# EAGLE board Temp controlled fan (2) (EAGLE 8.4.1)
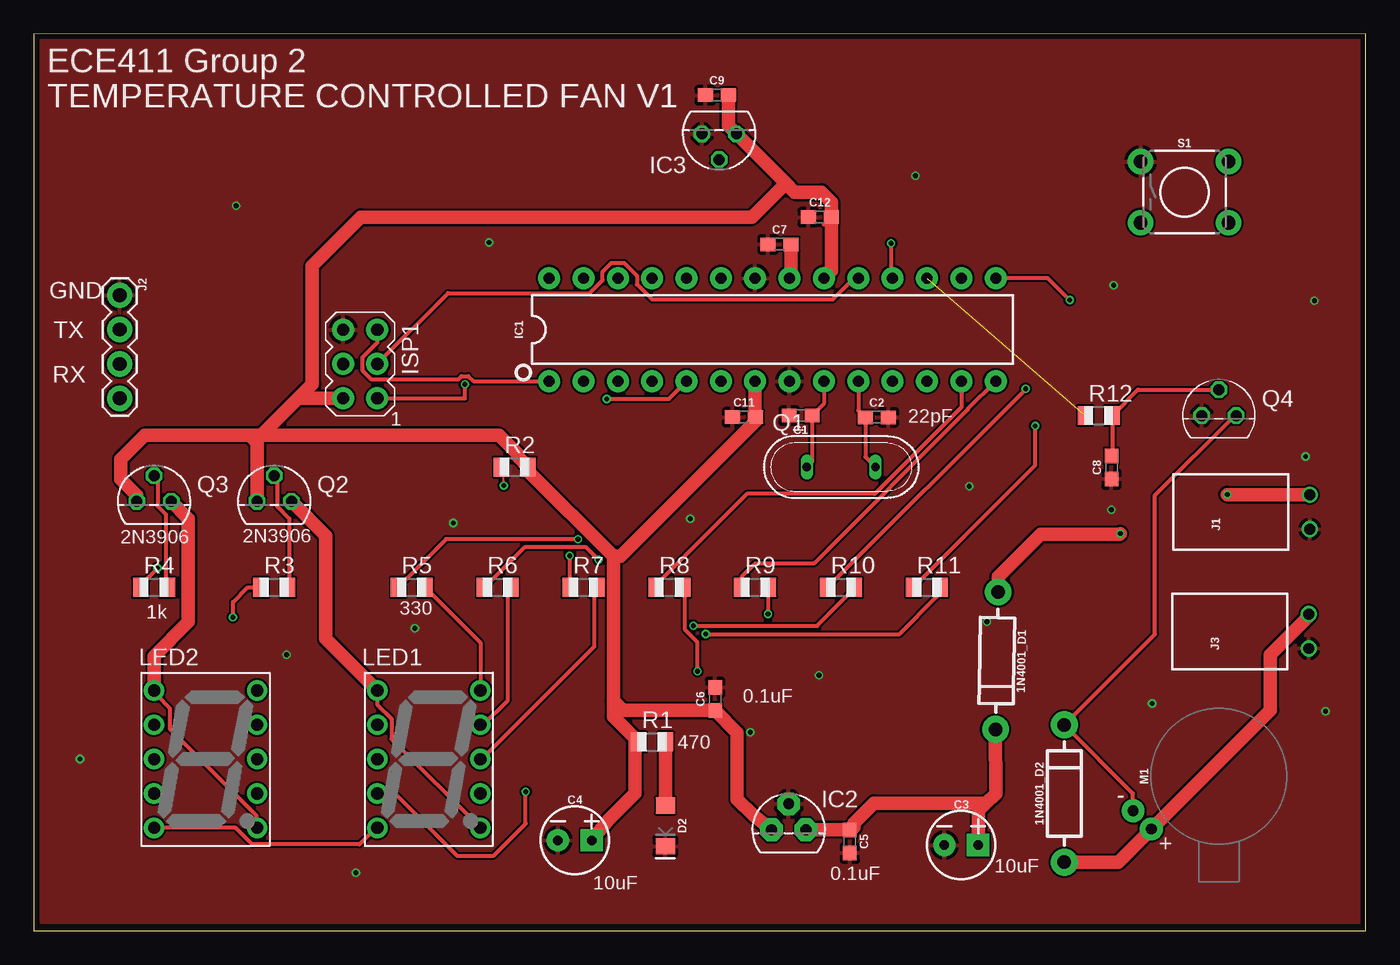
[diagram p0: board, top side]
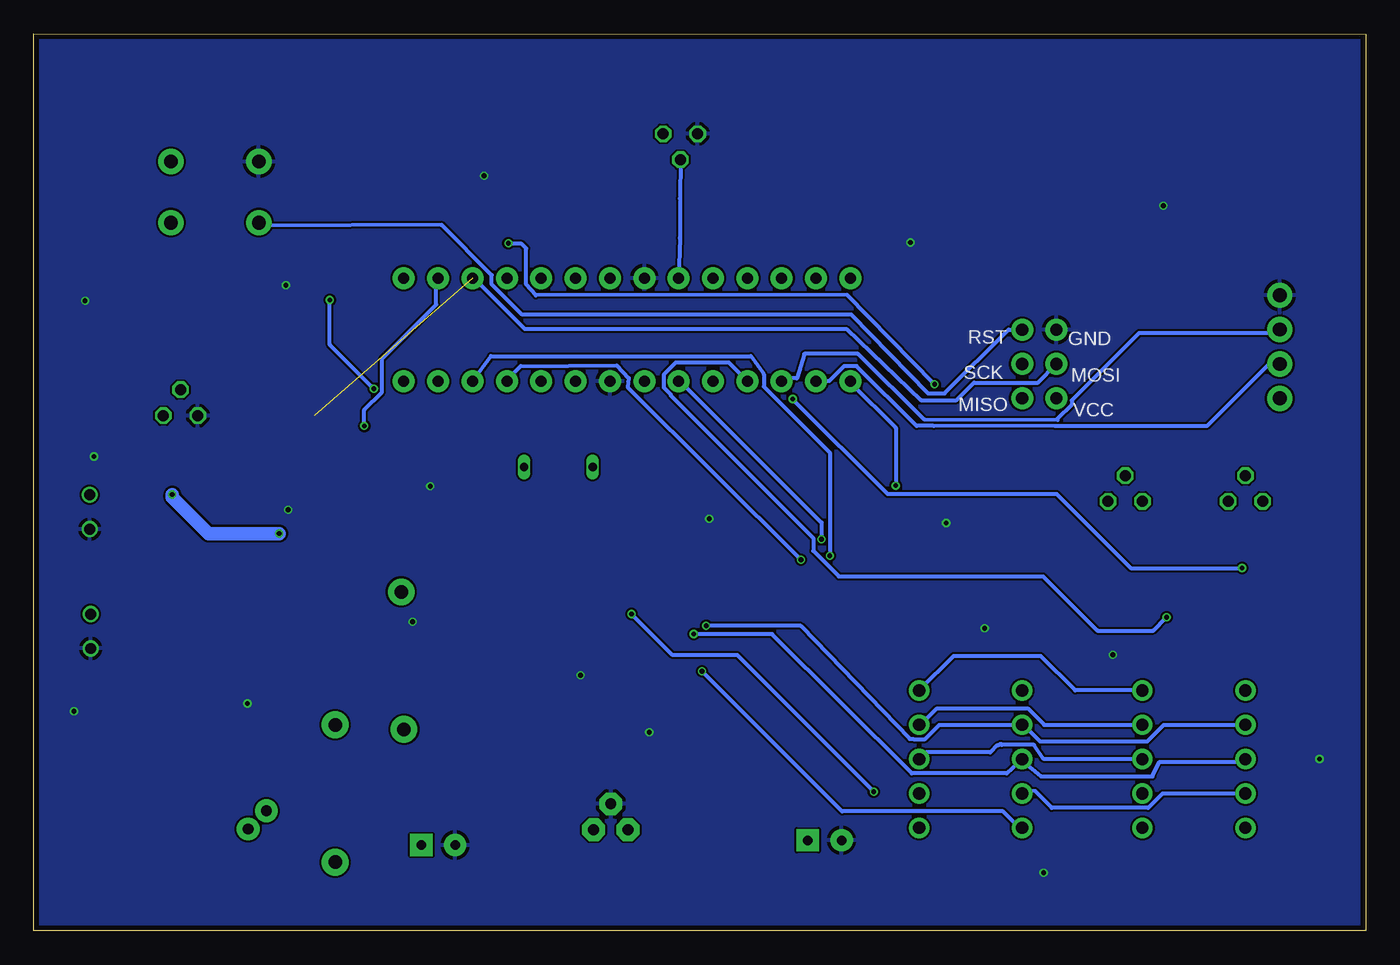
[diagram p1: board, bottom side, seen from below]

Size 98.48 x 66.31 mm. Coordinates in mm from the lower left corner, seen from the top.
Outline: 0,0 98.48,0.03 98.48,66.31 0,66.28 0,0
Copper layers (1*16): Top 0.035559375mm / dielectric 1.6mm / Bottom 0.035559375mm
Design rules "oshpark-2layer": minimum track width 6mil, minimum drill 10mil, track to track 6mil, track to pad 6mil, pad to pad 6mil, via to via 6mil, smd to smd 6mil, copper to edge 15mil, drill to drill 6mil, minimum pad ring 5mil, minimum via ring 5mil, stop-mask expansion 2.5mil, vias tented up to drill 0mil, thermal gap 10mil

## Footprints (pad centres in the part's own frame; a part is rotated, then mirrored left to right if it is on the bottom)
DIODE-1N4001 = drill 1 pad 1.981: A -5.08,0; C 5.08,0
0603 = smd 1.1 x 1: 1 -0.85,0; 2 0.85,0
CPOL-RADIAL-2.5MM-5MM = drill 0.7 pad 1.651 square: 1 1.25,0 | drill 0.7 pad 1.651: 2 -1.25,0
LED-1206 = smd 1.2 x 1.4: A -1.5,0; C 1.5,0
DIP28 = drill 0.813 pad 1.626: 1 -16.51,-3.81; 2 -13.97,-3.81; 3 -11.43,-3.81; 4 -8.89,-3.81; 5 -6.35,-3.81; 6 -3.81,-3.81; 7 -1.27,-3.81; 8 1.27,-3.81; 9 3.81,-3.81; 10 6.35,-3.81; 11 8.89,-3.81; 12 11.43,-3.81; 13 13.97,-3.81; 14 16.51,-3.81; 15 16.51,3.81; 16 13.97,3.81; 17 11.43,3.81; 18 8.89,3.81; 19 6.35,3.81; 20 3.81,3.81; 21 1.27,3.81; 22 -1.27,3.81; 23 -3.81,3.81; 24 -6.35,3.81; 25 -8.89,3.81; 26 -11.43,3.81; 27 -13.97,3.81; 28 -16.51,3.81
TO92 = drill 0.813 pad 1.676 octagon: 1 -1.27,0; 2 0,1.905; 3 1.27,0
TO92' = drill 0.813 octagon: 1 -1.27,0; 2 0,1.905; 3 1.27,0
AVRISP = drill 0.9 pad 1.626: 1 -1.27,2.54; 2 1.27,2.54; 3 -1.27,0; 4 1.27,0; 5 -1.27,-2.54; 6 1.27,-2.54
1X02_RA_PTH_FEMALE = drill 0.8: 1 1.27,-5.85; 2 -1.27,-5.85
1X04 = drill 1.016 pad 1.88: 1 0,0; 2 2.54,0; 3 5.08,0; 4 7.62,0
LA-401 = drill 0.9 pad 1.5: 1 -3.81,5.08; 2 -3.81,2.54; 3 -3.81,0; 4 -3.81,-2.54; 5 -3.81,-5.08; 6 3.81,-5.08; 7 3.81,-2.54; 8 3.81,0; 9 3.81,2.54; 10 3.81,5.08
VIBE-MOTOR-10MM = drill 0.8 pad 1.676: + -5,-3.9; - -6.35,-2.54
QS = drill 0.61 long: 1 -2.54,0; 2 2.54,0
TO92'' = drill 0.813 octagon: 1 1.27,0; 2 0,1.905; 3 -1.27,0
R0805 = smd 1.1 x 1.4: 1 -1,0; 2 1,0
TACTILE_SWITCH_PTH_6.0MM = drill 1.016 pad 1.88: 1 -3.251,2.261; 2 3.251,2.261; 3 -3.251,-2.261; 4 3.251,-2.261

## Placement (x,y rotation side)
1N4001_D1  1A/50V/1.1V  [DIODE-1N4001]  71.21,19.98 268.9 top
1N4001_D2  1A/50V/1.1V  [DIODE-1N4001]  76.2,10.16 90 top
C1  22pF  [0603]  56.7,38.09 180 top
C2  22pF  [0603]  62.33,37.97 0 top
C3  10uF  [CPOL-RADIAL-2.5MM-5MM]  68.58,6.35 0 top
C4  10uF  [CPOL-RADIAL-2.5MM-5MM]  40.01,6.7 0 top
C5  0.1uF  [0603]  60.34,6.62 270 top
C6  0.1uF  [0603]  50.38,17.15 90 top
C7  100nF  [0603]  55.14,50.76 0 top
C8  100nF  [0603]  79.69,34.26 90 top
C9  100nF  [0603]  50.5,61.79 0 top
C11  100nF  [0603]  52.52,37.98 0 top
C12  100nF  [0603]  58.12,52.77 0 top
D2  2.5V  [LED-1206]  46.7,7.77 270 top
IC1  ATMEGA328P  [DIP28]  54.61,44.45 0 top
IC2  7805L  [TO92]  55.82,7.48 0 top
IC3  LM35  [TO92']  50.67,58.92 180 top
ISP1  AVRISP-6  [AVRISP]  24.13,41.91 180 top
J1  9V/12V  [1X02_RA_PTH_FEMALE]  88.5,30.97 90 top
J2  [1X04]  6.35,46.99 270 top
J3  9V/12V  [1X02_RA_PTH_FEMALE]  88.43,22.15 90 top
LED1  LA-401MD  [LA-401]  29.21,12.7 0 top
LED2  LA-401MD  [LA-401]  12.7,12.7 0 top
M1  MOTOR10MM  [VIBE-MOTOR-10MM]  87.63,11.43 0 top
Q1  16MHz  [QS]  59.69,34.29 0 top
Q2  2N3906  [TO92'']  17.78,31.75 0 top
Q3  2N3906  [TO92'']  8.89,31.75 0 top
Q4  2N3904  [TO92'']  87.63,38.1 0 top
R1  470  [R0805]  45.72,13.97 0 top
R2  10K  [R0805]  35.56,34.29 0 top
R3  1K  [R0805]  17.78,25.4 0 top
R4  1K  [R0805]  8.89,25.4 0 top
R5  330  [R0805]  27.94,25.4 0 top
R6  330  [R0805]  34.29,25.4 0 top
R7  330  [R0805]  40.64,25.4 0 top
R8  330  [R0805]  46.99,25.4 0 top
R9  330  [R0805]  53.34,25.4 0 top
R10  330  [R0805]  59.69,25.4 0 top
R11  330  [R0805]  66.04,25.4 0 top
R12  1K  [R0805]  78.74,38.1 0 top
S1  MOMENTARY-SWITCH-SPST-PTH-6.0MM  [TACTILE_SWITCH_PTH_6.0MM]  85.09,54.61 0 top

## Library data of the parts
1N4001_D1 1N4001_D2 = SparkFun-DiscreteSemi; PROD_ID: DIO-09176
C1 C2 C7-C9 C11 C12 = SparkFun-Capacitors; PROD_ID: CAP-07876
C3 C4 = SparkFun-Capacitors; PROD_ID: CAP-08440
C5 C6 = SparkFun-Capacitors; PROD_ID: CAP-08604
D2 = SparkFun-LED
IC1 = SparkFun-IC-Microcontroller; PROD_ID: IC-09136
IC2 ISP1 R1-R12 = adafruit
IC3 = lm35
J1 J3 = SparkFun-Connectors; PROD_ID: CONN-13700
J2 = SparkFun-Connectors; PROD_ID: CONN-09696
LED1 LED2 = led-7-segment; OC_FARNELL: unknown; OC_NEWARK: unknown
M1 = SparkFun-Electromechanical; PROD_ID: COMP-08572; SF_SKU: ROB-08449
Q1 = special
Q2 Q3 = transistor-pnp
Q4 = transistor-npn
S1 = SparkFun-Switches; PROD_ID: SWCH-08441; SF_SKU: COM-00097

## Nets
CTRL1: IC1.4 R3.1
CTRL2: IC1.5 R4.1
GND: C1.2 C2.2 C3.2 C4.2 C5.2 C6.2 C7.1 C8.1 C9.1 C11.1 C12.1 D2.C IC1.8 IC1.22 IC2.2 IC3.3 ISP1.6 J1.2 J2.1 J3.2 Q4.3 S1.1
MISO: IC1.18 ISP1.1
MOSI: IC1.17 ISP1.4 R12.1
N$1: C2.1 IC1.10 Q1.2
N$2: C7.2 IC1.21
N$3: C1.1 IC1.9 Q1.1
N$4: IC1.23 IC3.2
N$5: D2.A R1.2
N$7: 1N4001_D1.C C3.1 C5.1 IC2.3
N$9: LED2.1 LED2.6 Q3.1
N$11: LED1.1 LED1.6 Q2.1
N$12: Q3.2 R4.2
N$13: Q2.2 R3.2
N$14: C8.2 Q4.2 R12.2
N$15: 1N4001_D2.C M1.- Q4.1
N$18: IC1.16 R11.1
N$19: IC1.15 R10.1
N$20: IC1.14 R9.1
N$21: IC1.13 R8.1
N$22: IC1.12 R7.1
N$23: IC1.11 R6.1
N$24: IC1.6 R5.1
RST: IC1.1 ISP1.5 R2.1 S1.3
RX: IC1.2 J2.3
SCK: IC1.19 ISP1.3
SEG_A: LED1.10 LED2.10 R5.2
SEG_B: LED1.9 LED2.9 R6.2
SEG_C: LED1.8 LED2.8 R7.2
SEG_D: LED1.5 LED2.5 R8.2
SEG_E: LED1.4 LED2.4 R9.2
SEG_F: LED1.2 LED2.2 R10.2
SEG_G: LED1.3 LED2.3 R11.2
TX: IC1.3 J2.2
V_IN: 1N4001_D1.A J1.1
V_MOTOR: 1N4001_D2.A J3.1 M1.+
VCC: C4.1 C6.1 C9.2 C11.2 C12.2 IC1.7 IC1.20 IC2.1 IC3.1 ISP1.2 Q2.3 Q3.3 R1.1 R2.2

## Tracks (layer width: path | path; a pad name or v marks a point on that pad's centre or on a via)
CTRL1  (via drill 0.35)
  Top 0.305: 16.78,25.24 R3.1 15.82,25.4 14.73,24.3 v14.73,23.19 v14.73,23.18
  Bottom 0.305: IC1.4 47.08,42 51.02,42 51.92,41.1 51.92,40.18 51.39,39.65 51.39,39.58 40.84,29.03 40.84,28.09 38.96,26.22 23.85,26.22 19.83,22.2 15.72,22.2 v14.73,23.18
CTRL2  (via drill 0.35)
  Top 0.152: 7.92,25.6 R4.1
  Top 0.305: v9.14,26.82 7.92,25.6 | v42.37,39.32 46.94,39.32 IC1.5
  Bottom 0.305: v9.14,26.82 17.37,26.82 22.86,32.31 35.36,32.31 v42.37,39.32
GND  (via drill 0.35)
  other vias: 14.97,53.6 33.67,50.88 65.19,55.81 79.84,47.72 79.67,31.14 69.17,32.87 48.54,30.46 31.02,30.15 28.17,22.38 18.7,20.42 3.41,12.71 23.82,4.3 52.97,14.68 58.05,18.9 70.48,22.85 82.69,16.81 95.51,16.25 94.04,35.07 94.69,46.59
  pour Top: 0.56,66.03 0.56,0.66 98.15,0.66 98.15,66.01 0.93,66.01
  pour Bottom: 0.35,66.06 0.35,0.48 98.2,0.48 98.2,66.08 0.84,66.08
MISO  (via drill 0.35)
  Top 0.305: ISP1.1 31.89,39.37 v31.88,40.4 | v63.39,50.83 63.39,48.37 IC1.18
  Bottom 0.305: v31.88,40.4 38.36,47.02 61.36,46.98 62.08,47.8 62.08,50.46 62.41,50.8 63.35,50.8 v63.39,50.83
MOSI  (1 unrouted)
  Bottom 0.305: IC1.17 65.84,48.16 62.18,44.5 38.41,44.5 32.88,39.23 30.26,39.23 28.96,40.54 24.23,40.54 ISP1.4
N$1
  Top 0.305: IC1.10 60.96,38.49 C2.1 61.48,35.04 Q1.2
N$2
  Top 1.016: C7.2 55.99,48.37 IC1.21
N$3
  Top 0.305: IC1.9 58.42,38.96 C1.1 57.55,34.69 Q1.1
N$4
  Bottom 0.305: IC3.2 50.71,54.12 50.7,51.21 IC1.23
N$5
  Top 1.016: R1.2 46.7,13.95 D2.A
N$7
  Top 1.016: 1N4001_D1.C 71.12,10.16 70.41,9.45 | 70.41,9.45 69.83,8.87 C3.1 | IC2.3 59.86,7.48 C5.1 60.64,7.67 60.64,7.96 62.13,9.45 70.41,9.45
N$9
  Top 0.152: 16.46,7.62 LED2.6 | 9.14,17.37 LED2.1
  Top 0.305: 16.46,7.62 16.46,8.53 10.06,14.94 10.06,16.46 9.14,17.37
  Top 1.016: Q3.1 11.43,30.48 11.43,22.86 8.89,20.32 LED2.1
N$11
  Top 0.305: LED1.1 25.4,16.73 26.45,15.68 26.45,14.19 LED1.6
  Top 1.016: Q2.1 21.59,29.21 21.59,21.59 LED1.1
N$12
  Top 0.152: 9.75,25.6 R4.2 | 9.14,33.53 Q3.2
  Top 0.305: 9.75,25.6 9.75,30.79 9.14,31.39 9.14,33.53
N$13
  Top 0.152: 18.9,25.6 R3.2 | 17.98,33.53 Q2.2
  Top 0.305: 18.9,25.6 18.9,30.48 17.98,31.39 17.98,33.53
N$14
  Top 0.305: Q4.2 81.64,40.01 R12.2 79.74,35.16 C8.2
N$15
  Top 0.305: M1.- 81.28,10.16 1N4001_D2.C 82.89,21.93 82.89,32.2 88.79,38.1 Q4.1
N$18  (via drill 0.35)
  Top 0.305: R11.1 74.05,34.41 v74.05,37.33 | v74.05,37.33 74.05,37.37 v74.05,37.33
  Bottom 0.305: v74.05,37.33 74.05,38.52 72.73,39.83 72.73,42.29 68.72,46.3 68.72,48.12 IC1.16
N$19  (via drill 0.35)
  Top 0.305: R10.1 73.34,40.05 v73.34,40.08 | v76.6,46.64 74.97,48.26 IC1.15
  Bottom 0.305: v73.34,40.08 76.6,43.34 v76.6,46.64
N$20
  Top 0.305: IC1.14 69.04,38.56 69.04,38.52 57.67,27.16 53.33,27.16 52.34,26.17 R9.1
N$21
  Top 0.152: 46.02,25.6 R8.1
  Top 0.305: 46.02,25.6 52.73,32.31 62.18,32.31 68.58,38.71 IC1.13
N$22  (via drill 0.35)
  Top 0.152: 39.62,25.6 R7.1
  Top 0.305: v39.62,27.74 39.62,25.6
  Bottom 0.305: v39.62,27.74 39.62,35.36 44.5,40.23 44.5,41.15 45.47,42.49 64.67,42.49 IC1.12
N$23  (via drill 0.35)
  Top 0.152: 33.53,25.6 R6.1
  Top 0.305: 33.53,25.6 36.27,28.35 40.84,28.35 v41.76,27.43
  Bottom 0.305: v41.76,27.43 54.58,40.2 54.49,40.86 55.39,41.81 62.48,41.76 63.4,40.84 IC1.11
N$24  (via drill 0.35)
  Top 0.152: 27.13,25.6 R5.1
  Top 0.305: 27.13,25.6 30.48,28.96 v40.23,28.96
  Bottom 0.305: v40.23,28.96 40.23,30.18 50.6,40.54 IC1.6
RST  (via drill 0.35)
  Top 0.152: v34.75,32.92 34.75,34.14 R2.1
  Top 0.305: IC1.1 32.5,40.64 32.13,41.01 31.63,41.01 31.41,40.79 24.94,40.79 24.28,41.45 24.28,42.37 25.4,43.49 ISP1.5
  Bottom 0.152: 38.1,40.54 IC1.1 | ISP1.5 25.6,44.5
  Bottom 0.305: v34.75,32.92 34.75,37.19 38.1,40.54 | S1.3 81.69,52.12 68.34,52.19 64.62,48.47 64.62,47.8 62.37,45.55 38.04,45.55 32.37,39.73 31.13,39.73 26.41,44.45 ISP1.5
RX
  Bottom 0.305: 22.59,37.31 | 22.59,37.31 22.78,37.31 22.97,37.31 31.95,37.34 31.96,37.33 33.2,37.33 37.64,41.76 38.56,41.76 39.68,40.64 IC1.2 | J2.3 6.35,42.69 11.76,37.31 22.59,37.31
SCK
  Top 0.305: IC1.19 60.65,48.26 59.07,46.69 45.71,46.69 44.6,47.8 44.6,48.42 43.64,49.38 42.72,49.38 42.06,48.72 42.06,48.1 41.1,47.14 30.63,47.14 ISP1.3
SEG_A
  Top 0.305: R5.2 33.02,21.32 LED1.10
  Bottom 0.305: LED2.10 21.48,17.78 24.02,20.32 30.48,20.32 LED1.10
SEG_B
  Top 0.152: 35.05,25.3 R6.2
  Top 0.305: 35.05,25.3 35.05,17.07 33.22,15.24 LED1.9
  Bottom 0.152: 32.92,15.24 LED1.9
  Bottom 0.305: LED2.9 23.77,15.24 24.99,16.46 31.7,16.46 32.92,15.24
SEG_C
  Top 0.152: 41.45,25.3 R7.2
  Top 0.305: 41.45,25.3 41.45,21.03 33.22,12.8 LED1.8
  Bottom 0.305: LED2.8 16.66,12.72 23.84,12.74 24.53,13.76 26.91,13.76 26.96,13.81 27.04,13.81 27.12,13.73 27.18,13.73 27.23,13.7 27.26,13.71 27.76,13.21 32.51,13.21 LED1.8
SEG_D  (via drill 0.35)
  Top 0.152: 48.16,25.3 R8.2 | 25.3,7.62 LED1.5
  Top 0.305: 48.16,25.3 48.16,22.25 49.07,21.34 v49.07,19.2 | LED2.5 14.94,7.62 16.15,6.4 24.08,6.4 25.3,7.62
  Bottom 0.305: v49.07,19.2 38.71,8.84 26.82,8.84 25.6,7.62 LED1.5
SEG_E  (via drill 0.35)
  Top 0.305: LED1.4 26.7,10.16 31.29,5.57 34.01,5.57 36.37,7.93 v36.37,10.28 | v54.29,23.42 54.34,23.47 R9.2
  Bottom 0.152: LED1.4 25.3,10.36
  Bottom 0.305: 25.3,10.36 24.43,10.34 23.2,9.11 16.07,9.11 15.02,10.16 LED2.4 | v36.37,10.28 46.47,20.38 51.25,20.38 v54.29,23.42
SEG_F  (via drill 0.35)
  Top 0.152: 60.66,25.3 R10.2
  Top 0.305: 60.66,25.3 57.91,22.55 v48.77,22.55
  Bottom 0.152: 25.6,15.24 25.48,15.24 LED1.2 25.3,15.24
  Bottom 0.305: v48.77,22.55 41.76,22.55 33.71,14.19 33.46,14.19 32.58,14.19 31.53,15.24 25.48,15.24 | LED2.2 14.94,15.24 16.15,14.02 24.08,14.02 25.3,15.24
SEG_G  (via drill 0.35)
  Top 0.152: 66.75,24.69 66.75,25.3 R11.2
  Top 0.305: 66.75,24.69 64.01,21.95 v49.68,21.95
  Bottom 0.152: 25.3,12.5 LED1.3
  Bottom 0.305: v49.68,21.95 43.89,21.95 33.56,11.64 26.55,11.64 LED1.3 | 25.3,12.5 24,11.43 15.77,11.43 15.24,12.5 9.14,12.5 LED2.3
TX
  Bottom 0.305: IC1.3 42.98,40.84 42.06,40.84 41.52,42.65 37.55,42.65 32.61,37.8 22.78,37.77 22.78,37.87 21.74,38.91 21.74,39.22 16.76,44.2 6.4,44.2 J2.2
V_IN  (via drill 0.35)
  Top 1.016: 1N4001_D1.A 71.31,26.17 74.46,29.32 80.28,29.32 v80.33,29.38 | v88.25,32.26 94.34,32.26 J1.1
  Bottom 1.016: v80.33,29.38 85.57,29.38 88.25,32.05 v88.25,32.26
V_MOTOR
  Top 1.016: 1N4001_D2.A 80.18,5.08 M1.+ 91.43,16.33 91.43,20.43 94.28,23.27 J3.1
VCC
  Top 0.305: 58.42,52.23 C12.2
  Top 1.016: C9.2 51.35,59.51 IC3.1 55.6,55.26 | 55.6,55.26 56.26,54.6 58.24,54.6 58.97,53.88 C12.2 58.97,48.8 IC1.20 | IC1.7 53.34,38 C11.2 53.37,37.69 43.38,27.7 42.85,27.7 | 16.8,36.63 34.4,36.63 35.77,35.26 35.77,35.08 R2.2 36.56,33.99 42.85,27.7 | 16.8,36.63 15.95,36.63 | 15.95,36.63 8.2,36.63 6.44,34.87 6.44,33.4 7.62,32.22 Q3.3 | 15.95,36.63 16.51,36.08 Q2.3 | 16.8,36.63 19.54,39.37 | 19.54,39.37 ISP1.2 | 19.54,39.37 20.59,40.42 20.59,49.18 24.18,52.77 53.1,52.77 55.6,55.26 | C4.1 42.52,8.26 44.46,10.19 44.46,14.23 | 44.46,14.23 42.85,15.84 42.85,17.01 | 44.46,14.23 R1.1 | 42.85,27.7 42.85,17.01 | 42.85,17.01 43.57,16.3 C6.1 52.01,14.67 52.01,9.74 53.22,8.54 IC2.1

## Text on the board
tPlace: ECE411 Group 2 | TEMPERATURE CONTROLLED FAN V1 | GND | TX | RX | 22pF | 2N3906 | 2N3906 | 1k | 330 | 0.1uF | 470 | 0.1uF | 10uF | 10uF
bPlace: GND | RST | MOSI | SCK | VCC | MISO